# Altium PCB 云台电源板.PcbDoc
Units mil, origin at the board's own origin, x right, y up, seen from the top; angles counter-clockwise.
Board outline 2566.41 x 1722.03 mil, 2 copper layers (Top Layer, Bottom Layer); 38 components, 28 nets, 126 pads, 7 vias.
Unrouted connection lines stored in the file: 28.
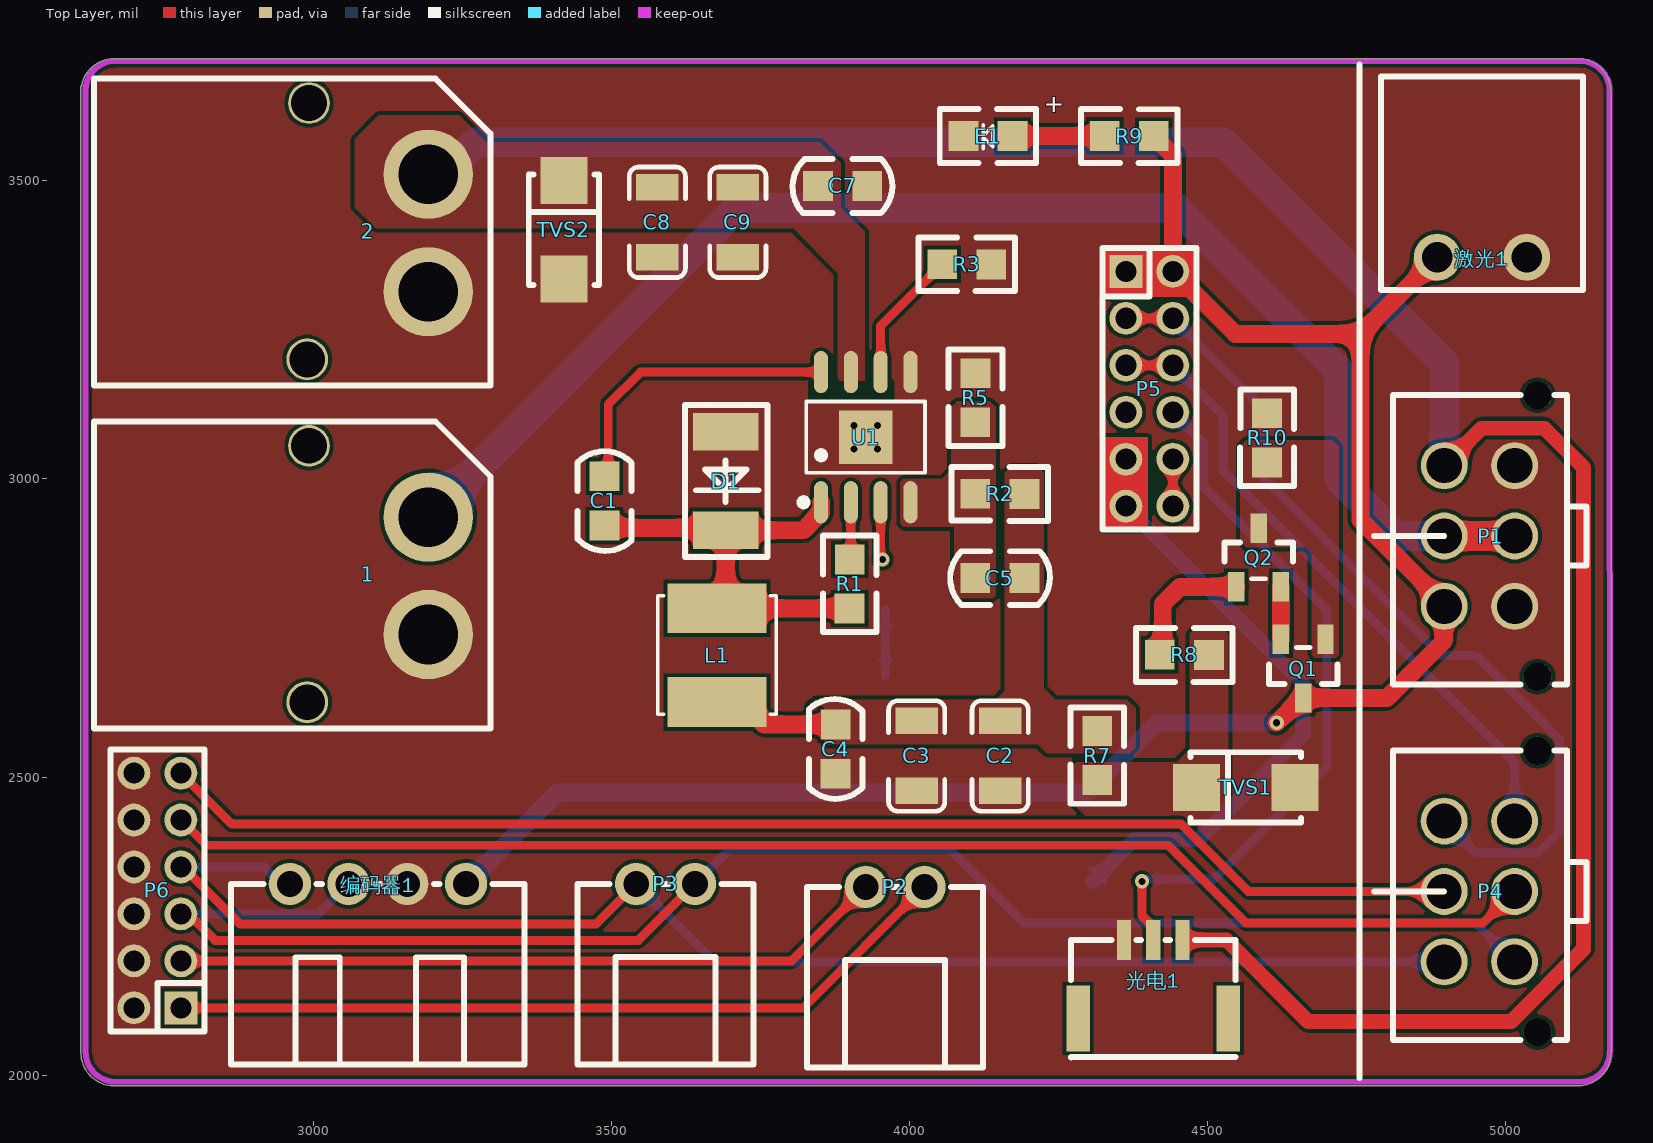
[diagram p0: Top Layer view]
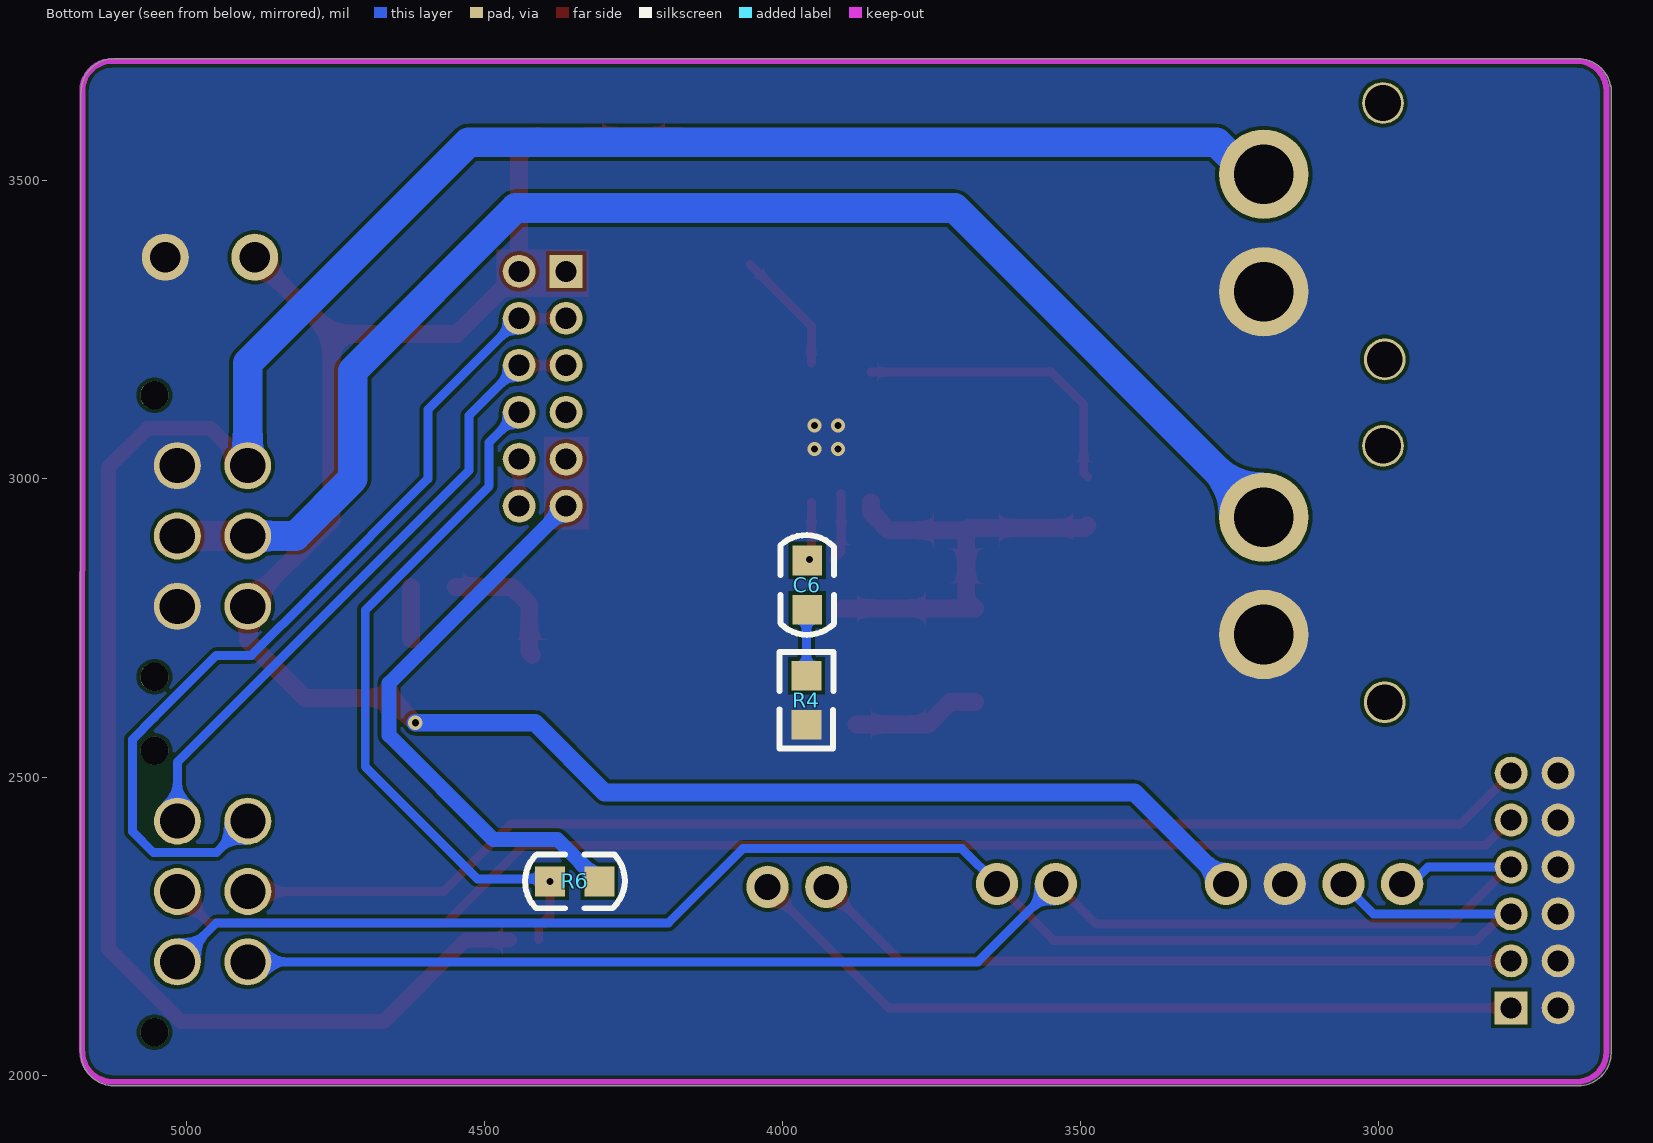
[diagram p1: Bottom Layer view, seen from below]
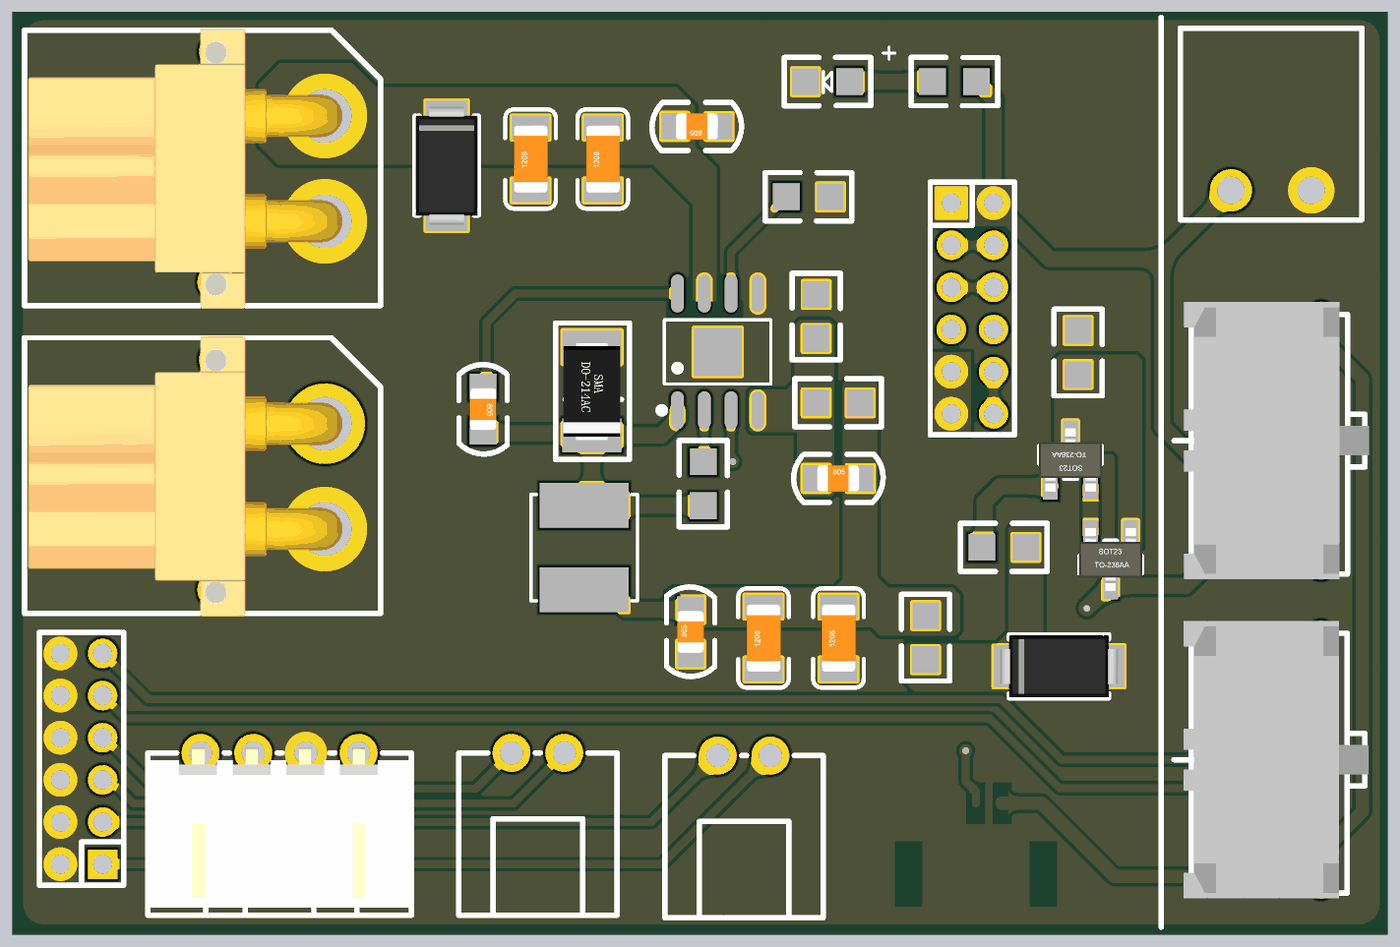
[diagram p2: 3D render of the assembled board from above, using the file's embedded part models]

## Layer stack, top to bottom
Top Solder: solder mask 0.4, Solder Resist, Dk 3.5
Top Layer: signal copper 1.4
Dielectric 1: dielectric 12.6, FR-4, Dk 4.8
Bottom Layer: signal copper 1.4
Bottom Solder: solder mask 0.4, Solder Resist, Dk 3.5

## Board outline
2610.56,2036.83 cw(c2615.54,2037.46) 2610.52,2037.46 2610.7,3648.3 cw(c2615.57,3649.46) 2610.56,3649.46 cw(c2665.57,3649.46) 2610.7,3653.35 2610.7,3657.46 cw(c2615.71,3657.46) 2611.66,3660.42 cw(c2665.57,3649.46) 2665.57,3704.48 cw(c2665.57,3699.46) 2665.62,3704.47 5121.69,3704.48 cw(c5121.69,3649.46) 5176.7,3650.11 cw(c5171.72,3649.46) 5176.74,3649.46 5176.93,2037.46 cw(c5171.92,2037.46) 5176.93,2037.46 cw(c5171.92,2037.46) 5176.68,2035.88 cw(c5121.69,2037.46) 5121.82,1982.45 cw(c5121.69,2037.46) 5121.69,1982.44 ccw(c5121.69,1987.46) 5121.82,1982.45 5121.69,1982.44 2665.57,1982.44 cw(c2665.57,2037.46)

## Design rules (kind name [scope] priority, off if disabled: settings)
Clearance [All] p1: gap=6 ignorepadtopadclearanceinfootprint=FALSE
DiffPairsRouting [All] p1: maxlimit=50 minlimit=5 mostfreqgap=10 toplayer_minwidth=15 toplayer_maxwidth=50 toplayer_prefwidth=15 bottomlayer_minwidth=15 bottomlayer_maxwidth=50 bottomlayer_prefwidth=15 maxuncoupledlength=500
PlaneConnect [All] p1: planeconnectstyle=Direct reliefexpansion=20 reliefentries=4 reliefconductorwidth=10 reliefairgap=10
PolygonConnect [All] p1: connectstyle=Direct reliefconductorwidth=10 reliefentries=4 polygonreliefangle="90 Angle" airgapwidth=10
RoutingVias [All] p1: holewidth=12 width=24 viastyle="Through Hole" minholewidth=12 minwidth=24 maxholewidth=12 maxwidth=24
SilkToSilkClearance [All] p1: silktosilkclearance=2
SolderMaskExpansion [All] p1: expansion=4 istentingtop=FALSE
Width [All] p1: maxlimit=100 minlimit=10 preferedwidth=10
27 further rules are at their usual default settings.

## Classes and differential pairs
differential pair CAN2: +CAN2_H -CAN2_L

## Components (designator, comment, footprint, x,y, rotation, side; value= is the part's Value field where it differs from the comment)
1 "底盘24V" XT30 2940,2820 r0 top
2 "云台24V" XT30 2940,3395 r0 top
C1 "0603" C0603 3490,2965 r90 top
C2 "1206" C1206 4150,2540 r0 top value=100uF
C3 "1206" C1206 4010,2540 r0 top value=100uF
C4 "0603" C0603 3875,2545 r270 top value=100nF
C5 "Cap" C0603 4150,2835 r180 top value=100pF
C6 "0603" C0603 3960,2820 r270 bottom value=470pF
C7 "0603" C0603 3890,3490 r0 top
C8 "1206" C1206 3575,3435 r0 top value=22uF
C9 "1206" C1206 3710,3435 r0 top value=22uF
D1 "D-Schottky" 肖特基 3700,3000 r90 top
E1 "LED" LED 4135,3580 r180 top
L1 "MHCI06030-6R8M-R8" L 3700,2700 r270 top value=47uH
P1 "6PIN" 6PIN 4975,2950 r0 top
P2 "CAN2" CAN 4010,2230 r0 top
P3 "CAN1" CAN 3625,2235 r0 top
P4 "6PIN" 6PIN 4974.83,2353.83 r0 top
P5 "12PIN" 12pin 4407.92,3116.84 r0 top
P6 "12PIN" 12pin 2733.34,2344.25 r180 top
Q1 "SI2301 2.3A ." SOT3 4676.14,2680 r0 top
Q2 "PMBT3906" SOT3 4570,2870 r180 top
R1 "0603" R0603 4204,2807.3 r90 top
R2 "0603" R0603 4168.32,3279 r180 top value=40.2K
R3 "0603" R0603 4079.6,3055.8 r0 top
R4 "0603" R0603 4264.2,2645.4 r270 bottom value=33K
R5 "0603" R0603 4414.82,3119.6 r90 top value=7.68K
R6 "Res1" 0805 4357.08,2308.11 r270 bottom value=10K
R7 "Res2" R0603 4011,2552.7 r270 top value=12.4k
R8 "Res2" R0603 4444.6,2400.8 r0 top value=4.7K
R9 "Res2" R0603 4352.3,3271 r0 top value=10K
R10 "Res2" R0603 4904,3052.3 r90 top value=10K
TVS1 "SMAJ5.0CA" SMAJ5.0 4570,2465 r0 top
TVS2 "SMAJ24" SMAJ24 3420,3425 r0 top
U1 "FP6151" FP 3911.81,3070 r90 top
光电1 "3PIN" 光电 54420.49,52140.37 r0 top
激光1 "2pin绿" 2pin 4985,3490 r0 top
编码器1 "4PIN" 编码器 3120,2233.77 r0 top

## Footprints (in the part's own frame and the unit in brackets; to place one, negate y for a bottom-side part, rotate by r counter-clockwise, add the part's x,y. Pads: shape width x height; smd on the part's side, far side on the other; paste and mask are expansions set on the pad)
2pin [mm]
  round 2 hole 1.3: 1(1.278,-3.001) 2(-2.532,-3.001)
  silkscreen extent -4.94,-4.4 3.68,4.7
6PIN [mm]
  round 2 hole 1.5: 1(-1.98,-4.161) 2(1.02,-4.161) 3(-1.98,-1.162) 4(1.02,-1.162) 5(-1.98,1.838) 6(1.02,1.838)
  round 1.2 hole 1.2 unplated: ""(1.997,-7.16) ""(1.997,4.836)
  silkscreen extent -4.98,-7.49 4.08,4.84, body extent -4.51,-7.74 4.26,5.41, height 9.95
12pin [mm]
  rect 1.4x1.4 hole 0.9: 1(-1.138,5.874)
  round 1.4 hole 0.9: 2(0.862,5.874) 3(-1.138,3.874) 4(0.862,3.874) 5(-1.138,1.874) 6(0.862,1.874) 7(-1.138,-0.126) 8(0.862,-0.126) 9(-1.138,-2.126) 10(0.862,-2.126) 11(-1.138,-4.126) 12(0.862,-4.126)
  silkscreen extent -2.14,-5.13 1.86,6.87
0805 [mil]
  rect 50x50 smd: 1(-16.89,-32.92) 2(-16.79,49.78)
  silkscreen extent -62,-75 28,92, body extent -42,-31 8,48, height 30
C0603 [mil]
  rect 50x50 smd: 1(39.38,1.32) 2(-43.32,1.42)
  silkscreen extent -86,-44 81,46, body extent -41,-23 37,26, height 30
C1206 [mm]
  rect 1.8x1.13 smd: 1(0.058,-1.606) 2(0.058,1.374)
  silkscreen extent -1.14,-2.47 1.26,2.24, body extent -0.73,-1.72 0.87,1.48, height 1
CAN [mm]
  round 1.8 hole 1.1: 1(-2.112,2.18) 2(0.388,2.18)
  silkscreen extent -4.61,-5.52 2.89,2.18
FP [mm]
  oval 1.8x0.6 smd: 1(-2.773,1.524) 2(-2.773,0.254) 3(-2.773,-1.016) 4(-2.773,-2.286) 5(2.773,-2.286) 6(2.773,-1.016) 7(2.773,0.254) 8(2.773,1.524)
  rect 2.29x2.29 smd: 9(0,-0.381)
  silkscreen extent -2.92,-2.91 1.52,2.42
L [mm]
  rect 2.124x4.22 smd: 1(1.887,-0.573) 2(-2.113,-0.573)
  silkscreen extent -2.64,-3.1 2.41,1.95
LED [mil]
  rect 50x50 smd: 1(-37.97,4.92) 2(44.33,5.12)
  silkscreen extent -78,-40 84,50, body extent -36,-20 42,30, height 20
R0603 [mil]
  rect 50x50 smd: 1(57.7,304) 2(-24.6,304.2)
  silkscreen extent -64,259 97,349, body extent -22,280 56,329, height 10
SMAJ5.0 [mm]
  rect 2x2 smd: 1(1.95,0.445) 2(-2.25,0.445)
  silkscreen extent -2.5,-1.05 2.2,1.95, body extent -2.95,-1.03 2.65,1.92, height 2.7
SMAJ24 [mm]
  rect 2x2 smd: 1(0.018,-2.275) 2(0.018,1.925)
  silkscreen extent -1.48,-2.53 1.52,2.17, body extent -1.46,-2.98 1.49,2.62, height 2.7
SOT3 [mm]
  rect 0.7x1.25 smd: 1(0.552,1.298) 2(-1.348,1.298) 3(-0.398,-1.202)
  silkscreen extent -1.86,-0.6 1.06,0.95, body extent -1.9,-1.45 1.1,1.55, height 1.3
XT30 [mil]
  round 150 hole 100: 1(253.15,115.89) 2(253.15,-80.97)
  round 70 hole 60: 3(50.15,-194.54) 4(53.15,235.46)
  silkscreen extent -308,-239 357,276, body extent -301,-244 286,279, height 197
光电 [mm]
  rect 1x2.8 smd: 0(-1273.491,-1271.152) 0(-1267.092,-1271.152)
  rect 0.6x1.7 smd: 1(-1269.042,-1267.802) 2(-1270.291,-1267.802) 3(-1271.541,-1267.802)
  silkscreen extent -1273.79,-1272.8 -1266.79,-1267.8
编码器 [mm]
  round 1.8 hole 1.1: 1(-4.038,2.211) 2(-1.538,2.211) 3(0.962,2.211) 4(3.462,2.211)
  silkscreen extent -6.54,-5.49 5.96,2.21, body extent -6.59,-5.14 5.91,2.46, height 5.9
肖特基 [mil]
  rect 63x110 smd: 1(79,8) 2(-86,8)
  silkscreen extent -131,-62 124,76, body extent -95,-45 87,61, height 94

## Part data
1 2 P2 P3: library part 2PIN
C1 C2 C3 C4 C6 C7 C8 C9: library part Cap, "Capacitor", LatestRevisionDate=17-Jul-2002, LatestRevisionNote="Re-released for DXP Platform.", PackageDescription="Radial Cap, Thru-Hole; 2 Leads; 0.3 in Pin Spacing", PackageReference=RAD-0.3, Published=8-Jun-2000, Publisher="Altium Limited"
  C1 C7: 0603=100nF
C5: "Capacitor", LatestRevisionDate=17-Jul-2002, LatestRevisionNote="Re-released for DXP Platform.", PackageDescription="Radial Cap, Thru-Hole; 2 Leads; 0.3 in Pin Spacing", PackageReference=RAD-0.3, Published=8-Jun-2000, Publisher="Altium Limited"
D1: "肖特基二极管", Code_JEDEC=DO-214-AA, LatestRevisionDate=17-Jul-2002, LatestRevisionNote="Re-released for DXP Platform.", PackageReference=SMB, Published=8-Jun-2000, Publisher="Altium Limited", Type=SS56
E1: "Typical RED, GREEN, YELLOW, AMBER GaAs LED", PackageDocument=Feb-2002, LatestRevisionDate=17-Jul-2002, LatestRevisionNote="Re-released for DXP Platform.", PackageReference=3.2X1.6X1.1, Published=8-Jun-2000, Publisher="Altium Limited"
L1: library part Inductor, "Inductor", Code_IEC=1005, Code_JEITA=0402, LatestRevisionDate=29-May-2009, LatestRevisionNote="IPC-7351 Footprint Added.", PackageDescription="Chip Inductor", PackageReference=0402-A, Published=8-Jun-2000, Publisher="Altium Limited"
Q1: library part PMOS-2, "P-Channel Power MOSFET", ComponentLink1Description="Manufacturer Link", ComponentLink1URL=http://www.irf.com/, DatasheetVersion=PD-9.390D, LatestRevisionDate=17-Jul-2002, LatestRevisionNote="Re-released for DXP Platform.", Note="Pin 4 not drawn and electrically connected to Pin 2.", PackageDescription="TO, Thru-Hole, Vertical, Heatsink Mounted; 3 In-Line Leads; Pitch 2.54 mm", PackageReference=TO-220AB, PackageVersion=Feb-1997, Published=8-Jun-2000, Publisher="Altium Limited"
Q2: library part PNP, "PNP Bipolar Transistor", LatestRevisionDate=29-May-2009, LatestRevisionNote="IPC-7351 Footprint Added.", PackageDescription="3-Pin SOT-23 Package 0.95 mm Pitch, 2.4 mm Lead Span", PackageReference=SOT-23B, PackageVersion=Aug-1999, Published=8-Jun-2000, Publisher="Altium Limited"
R1 R2 R3 R4 R5: library part Res2, "Resistor", LatestRevisionDate=17-Jul-2002, LatestRevisionNote="Re-released for DXP Platform.", PackageDescription="Axial Device, Thru-Hole; 2 Leads; 0.4 in Pin Spacing", PackageReference=AXIAL-0.4, Published=8-Jun-2000, Publisher="Altium Limited"
  R1: 0603=100K
  R3: 0603=200K
R6: "贴片电阻", LatestRevisionDate=17-Jul-2002, LatestRevisionNote="Re-released for DXP Platform.", PackageReference=AXIAL-0.4, Published=8-Jun-2000, Publisher="Altium Limited"
R7 R8 R9 R10: "Resistor", LatestRevisionDate=17-Jul-2002, LatestRevisionNote="Re-released for DXP Platform.", PackageDescription="Axial Device, Thru-Hole; 2 Leads; 0.4 in Pin Spacing", PackageReference=AXIAL-0.4, Published=8-Jun-2000, Publisher="Altium Limited"
TVS1 TVS2: library part TVS
激光1: library part Molex-53398-0271, "Molex-53261-0871", LatestRevisionDate=17-Jul-2002, LatestRevisionNote="Re-released for DXP Platform.", Publisher="Altium Limited"

## Via types
v1: diameter 24, hole 12, Top Layer to Bottom Layer, 4 vias
v2: diameter 24, hole 12, Top Layer to Bottom Layer, tented both sides, 3 vias

## Nets (pads, with @x,y where several pads share a name; then routed paths per layer and width w, separated by ;. In a path a pad name is that pad's centre, name@x,y a point inside that pad or via, vN(x,y) a via of type N, cw(c..) or ccw(c..) an arc to the next point about the centre after c; other vN are vias at no path point)
+5: C2.2 C3.2 C4.2 C5.2 L1.1 R2.2 R7.2 | length 214.4
  Top Layer w30: L1.1 3718.72,2625.72 3756.11,2588.32 C4.2
CAN1_H: P3.2 P4.2 P6.5 编码器1.2 | length 2699.8
  Top Layer w15: P6.5 2789,2270.46 2802.82,2256.65 2805.13,2256.65 2835.56,2226.21 3545.67,2226.21 P3.2
  Bottom Layer w15: P6.5 3009.09,2270.46 编码器1.2 ; P3.2 3699.5,2380.04 4066.75,2380.04 4191.57,2255.23 4949.77,2255.23 P4.2
CAN1_L: P3.1 P4.1 P6.7 编码器1.1 | length 2434.8
  Top Layer w15: P6.7 2781.64,2349.2 2877,2253.84 3474.87,2253.84 P3.1
  Bottom Layer w15: P6.7 2917.54,2349.2 2945.91,2320.83 编码器1.1 ; P3.1 3672.69,2190 P4.1
CAN2_H: P2.2 P6.1 | length 1331.2
  Top Layer w15: P6.1 3822.44,2112.98 P2.2
CAN2_L: P2.1 P6.3 | length 1200.1
  Top Layer w15: P6.3 3802.75,2191.72 P2.1
GND: 1.2 2.2 C2.1 C3.1 C4.1 C7.1 C8.1 C9.1 D1.1 E1.2 P1.2 P1.6 P6.2 P6.4 P6.6 P6.8 P6.10 P6.12 R3.1 R4.1 R5.1 R10.1 TVS1.1 TVS2.1 U1.5 U1.9 光电1.3 激光1.1 编码器1.3
  other v1: 3907.13,3050.31 3946.5,3050.31 3907.13,3089.68 3946.5,3089.68
NetC1_1: C1.1 U1.8 | length 502.5
  Top Layer w15: C1.1 3495,3010.7 3495,3125 3549.15,3179.15 U1.8
NetC1_2: C1.2 D1.2 L1.2 R1.2 U1.1 | length 755.3
  Top Layer w30: C1.2 3492.43,2917.84 3688.16,2917.84 D1.2 ; U1.1 3851.81,2943.6 3822.21,2914 D1.2 ; R1.2 3899.56,2782.94 3677.7,2782.94 L1.2 3692,2797.73 D1.2
NetC5_1: C5.1 R2.1 R5.2 U1.4
NetC6_1: C6.1 R4.2 | length 111.2
  Bottom Layer w15: C6.1 3960,2779.3 R4.2
NetC6_2: C6.2 U1.3 | length 97.2
  Top Layer w15: U1.3 3951.81,2870.62 3955,2867.44 v2(3955,2865)
NetE1_1: E1.1 R9.2 | length 154.8
  Top Layer w30: E1.1 E1.1 4327.64,3575.14 R9.2
NetQ1_1: Q1.1 Q2.3 R10.2
NetQ1_2: Q1.2 Q2.2 | length 87.8
  Top Layer w30: Q1.2 Q2.2
NetQ2_1: Q2.1 R8.2 | length 222.3
  Top Layer w30: R8.2 4425,2710 4425,2790 4453.89,2818.89 Q2.1
NetR1_1: R1.1 U1.2 | length 116.3
  Top Layer w15: U1.2@3901.81,2975.85 3901.81,2878.19 R1.1@3915,2865
NetR3_2: R3.2 U1.6 | length 208.6
  Top Layer w15: U1.6@3951.81,3194.15 3951.81,3256.81 R3.2
NetR7_1: R7.1 R8.1 TVS1.2
TIM4_CH1(PD12): P4.5 P5.3 P5.4 | length 1472.6
  Top Layer w15: P5.3 P5.4
  Bottom Layer w15: P5.4 4595,3116.22 4595,3000 4787.5,2807.5 4891.01,2703.99 4949.51,2703.99 5053.51,2600 5090.57,2562.93 5090.57,2408.79 5055.13,2373.34 4949.76,2373.34 P4.5
TIM4_CH2(PD13): P4.6 P5.5 P5.6 | length 1080.6
  Top Layer w15: P5.5 P5.6
  Bottom Layer w15: P5.6 4526.24,3106.24 4526.24,3013.76 5015,2525 P4.6
TIM5_CH3(PA2): P5.10 P5.12 | length 78.7
  Top Layer w15: P5.12 P5.10
TIM5_CH4(PA3): P5.8 R6.1 光电1.2 | length 1197
  Top Layer w15: v2(4390,2325) 4390,2267.56 4409.02,2248.54 光电1.2
  Bottom Layer w15: v2(4390,2325) 4394.39,2329.39 4511.85,2329.39 4700,2517.55 4700,2780 4492.26,2987.74 4492.26,3061.48 P5.8
USART2_RX(PD6): P4.4 P6.9 | length 2330.5
  Top Layer w15: P6.9 2779.05,2427.94 2821.36,2385.64 4434.31,2385.64 4564.95,2255 4961.9,2255 P4.4
USART2_TX(PD5): P4.3 P6.11 | length 2201
  Top Layer w15: P6.11 2863.75,2421.08 4455.71,2421.08 4568.69,2308.1 P4.3
V3D3: P5.9 P5.11 R6.2 | length 961.6
  Bottom Layer w25: R6.2 4377.4,2395 4485,2395 4660,2570 4660,2657.52 P5.11
VOUT-5V: P1.1 P5.1 P5.2 Q1.3 R9.1 激光1.2 编码器1.4 | length 3163
  Top Layer w30: R9.1 4441.85,3543.15 P5.2 4546.64,3243.32 4756.78,3243.32 ; v2(4616.02,2591.02) Q1.3@4660,2635 ; Q1.3 4800.92,2632.69 4896.07,2727.84 4896.07,2785.18 P1.1 4897.06,2790.72 4756.78,2930.99 4756.78,3243.32 ; 激光1.2 4756.78,3243.32
  Bottom Layer w30: 编码器1.4 3409.77,2474.29 4298.53,2474.29 4415.26,2591.02 v2(4616.02,2591.02)
云台24V: 2.1 C7.2 C8.2 C9.2 P1.5 TVS2.2 U1.7 光电1.1 | length 3925.6
  Top Layer w25: 光电1.1 4531.63,2226.89 4668.52,2090 5009.18,2090 5130.68,2211.5 5130.68,3019.32 5065,3085 4959.68,3085 P1.5
  Bottom Layer w50: 2.1 3218.74,3510.89 3272.44,3564.58 4526.92,3564.58 4897.06,3194.44 P1.5
摩擦轮24V: 1.1 P1.3 P1.4 | length 2370.3
  Top Layer w50: P1.3 P1.4
  Bottom Layer w50: 1.1 3711.47,3454.21 4447.81,3454.21 4721.02,3181 4721.02,3000.45 4817.2,2904.27 P1.3
pads on no net: 1.3 1.4 2.3 2.4 P1. P4. P5.7 光电1.0

## Polygon pours and split planes (outlines as drawn)
GND on Top Layer "GND_L01_P013" (solid, remove dead copper, pour order 13): 2610.56,2036.83 cw(c2615.54,2037.46) 2610.52,2037.46 2610.7,3648.3 cw(c2615.57,3649.46) 2610.56,3649.46 cw(c2665.57,3649.46) 2610.7,3653.35 2610.7,3657.46 cw(c2615.71,3657.46) 2611.66,3660.42 cw(c2665.57,3649.46) 2665.57,3704.48 cw(c2665.57,3699.46) 2665.62,3704.47 5121.69,3704.48 cw(c5121.69,3649.46) 5176.7,3650.11 cw(c5171.72,3649.46) 5176.74,3649.46 5176.93,2037.46 cw(c5171.92,2037.46) 5176.93,2037.46 cw(c5171.92,2037.46) 5176.68,2035.88 cw(c5121.69,2037.46) 5121.82,1982.45 cw(c5121.69,2037.46) 5121.69,1982.44 ccw(c5121.69,1987.46) 5121.82,1982.45 5121.69,1982.44 2665.57,1982.44 cw(c2665.57,2037.46)
+5 on Top Layer "Top Layer-+5" (solid, remove dead copper, pour order 3): 3830,2570 3845,2555 4215,2555 4230,2540 4370,2540 4380,2550 4380,2615 4365,2630 4245,2630 4225,2650 4225,3010 4215,3020 4170,3020 4160,3010 4160,2645 4145,2630 3843.33,2630 3830,2620
NetQ1_1 on Top Layer "NETQ1_1_L01_P007" (solid, remove dead copper, pour order 7): 4715,2700 4720,2705 4720,3055 4710,3065 4565,3065 4555,3055 4555,2895 4565,2885 4665,2885 4675,2875 4675,2705 4680,2700
NetC5_1 on Top Layer "Top Layer-NetC5_1" (solid, remove dead copper, pour order 12): 3985,2995 3985,2925 3990,2920 4075,2920 4075,2805 4080,2800 4140,2800 4145,2805 4145,2925 4145,3120 4135,3130 4080,3130 4070,3120 4070,3015 4055,3000 3990,3000
云台24V on Top Layer "云台24V_L01_P010" (solid, remove dead copper, pour order 10): 3915,3135 3925,3145 3925,3415 3885,3455 3885,3530 3850,3565 3290,3565 3245,3610 3110,3610 3070,3570 3070,3455 3105,3420 3805,3420 3880,3345 3880,3145 3890,3135
NetR7_1 on Top Layer "NETR7_1_L01_P009" (solid, remove dead copper, pour order 9): 4275,2520 4275,2455 4295,2435 4435,2435 4445,2425 4525,2425 4535,2435 4535,2740 4530,2745 4475,2745 4470,2740 4470,2546.9 4448.1,2525 4280,2525
GND on Bottom Layer "GND_L02_P014" (solid, remove dead copper, pour order 14): 2610.56,2036.83 cw(c2615.54,2037.46) 2610.52,2037.46 2610.7,3648.3 cw(c2615.57,3649.46) 2610.56,3649.46 cw(c2665.57,3649.46) 2610.7,3653.35 2610.7,3657.46 cw(c2615.71,3657.46) 2611.66,3660.42 cw(c2665.57,3649.46) 2665.57,3704.48 cw(c2665.57,3699.46) 2665.62,3704.47 5121.69,3704.48 cw(c5121.69,3649.46) 5176.7,3650.11 cw(c5171.72,3649.46) 5176.74,3649.46 5176.93,2037.46 cw(c5171.92,2037.46) 5176.93,2037.46 cw(c5171.92,2037.46) 5176.68,2035.88 cw(c5121.69,2037.46) 5121.82,1982.45 cw(c5121.69,2037.46) 5121.69,1982.44 ccw(c5121.69,1987.46) 5121.82,1982.45 5121.69,1982.44 2665.57,1982.44 cw(c2665.57,2037.46)

## Keep-outs
Keep-Out Layer:
  lines w10: 2618.39,2039 2618.56,3659 ; 2618.43,2039 ccw(c2668.43,2039) 2668.43,1989 5124.54,1989 ccw(c5124.54,2039) 5174.54,2039 ; 2618.43,3651 cw(c2668.43,3651) 2668.43,3701 5124.54,3701 cw(c5124.54,3651) 5174.54,3651 ; 5174.58,3651 5174.77,2039

## Other copper
Top Layer:
  rectangle net V3D3: 4325,2915 4400,3070
  rectangle net VOUT-5V: 4325,3305 4480,3385
  pour cut-out: 3830,3164.55 3975,3165 3975,3130 3830,3130

## Silkscreen, mask and mechanical layers (free items; w line width, h text height)
Top Overlay:
  lines w10: 4755,1995 4755,3695
Mechanical 1:
  lines w10: 2615.57,3649.46 cw(c2665.57,3649.46) 2665.57,3699.46 5121.69,3699.46 cw(c5121.69,3649.46) 5171.69,3649.46 5171.92,2037.46 ; 2615.71,3657.46 2615.54,2037.46 ccw(c2665.57,2037.46) 2665.57,1987.46 5121.69,1987.46 ccw(c5121.69,2037.46) 5171.69,2037.46

## Text inside footprints (layer, text, board x,y; h text height)
E1: Top Overlay "+" at 4225,3640 h30 r180